# Altium PCB PCB1.PcbDoc
Units mm, origin at the board's own origin, x right, y up, seen from the top; angles counter-clockwise.
Board outline 76.45 x 67.82 mm, 2 copper layers (Top Layer, Bottom Layer); 87 components, 61 nets, 217 pads, 21 vias.
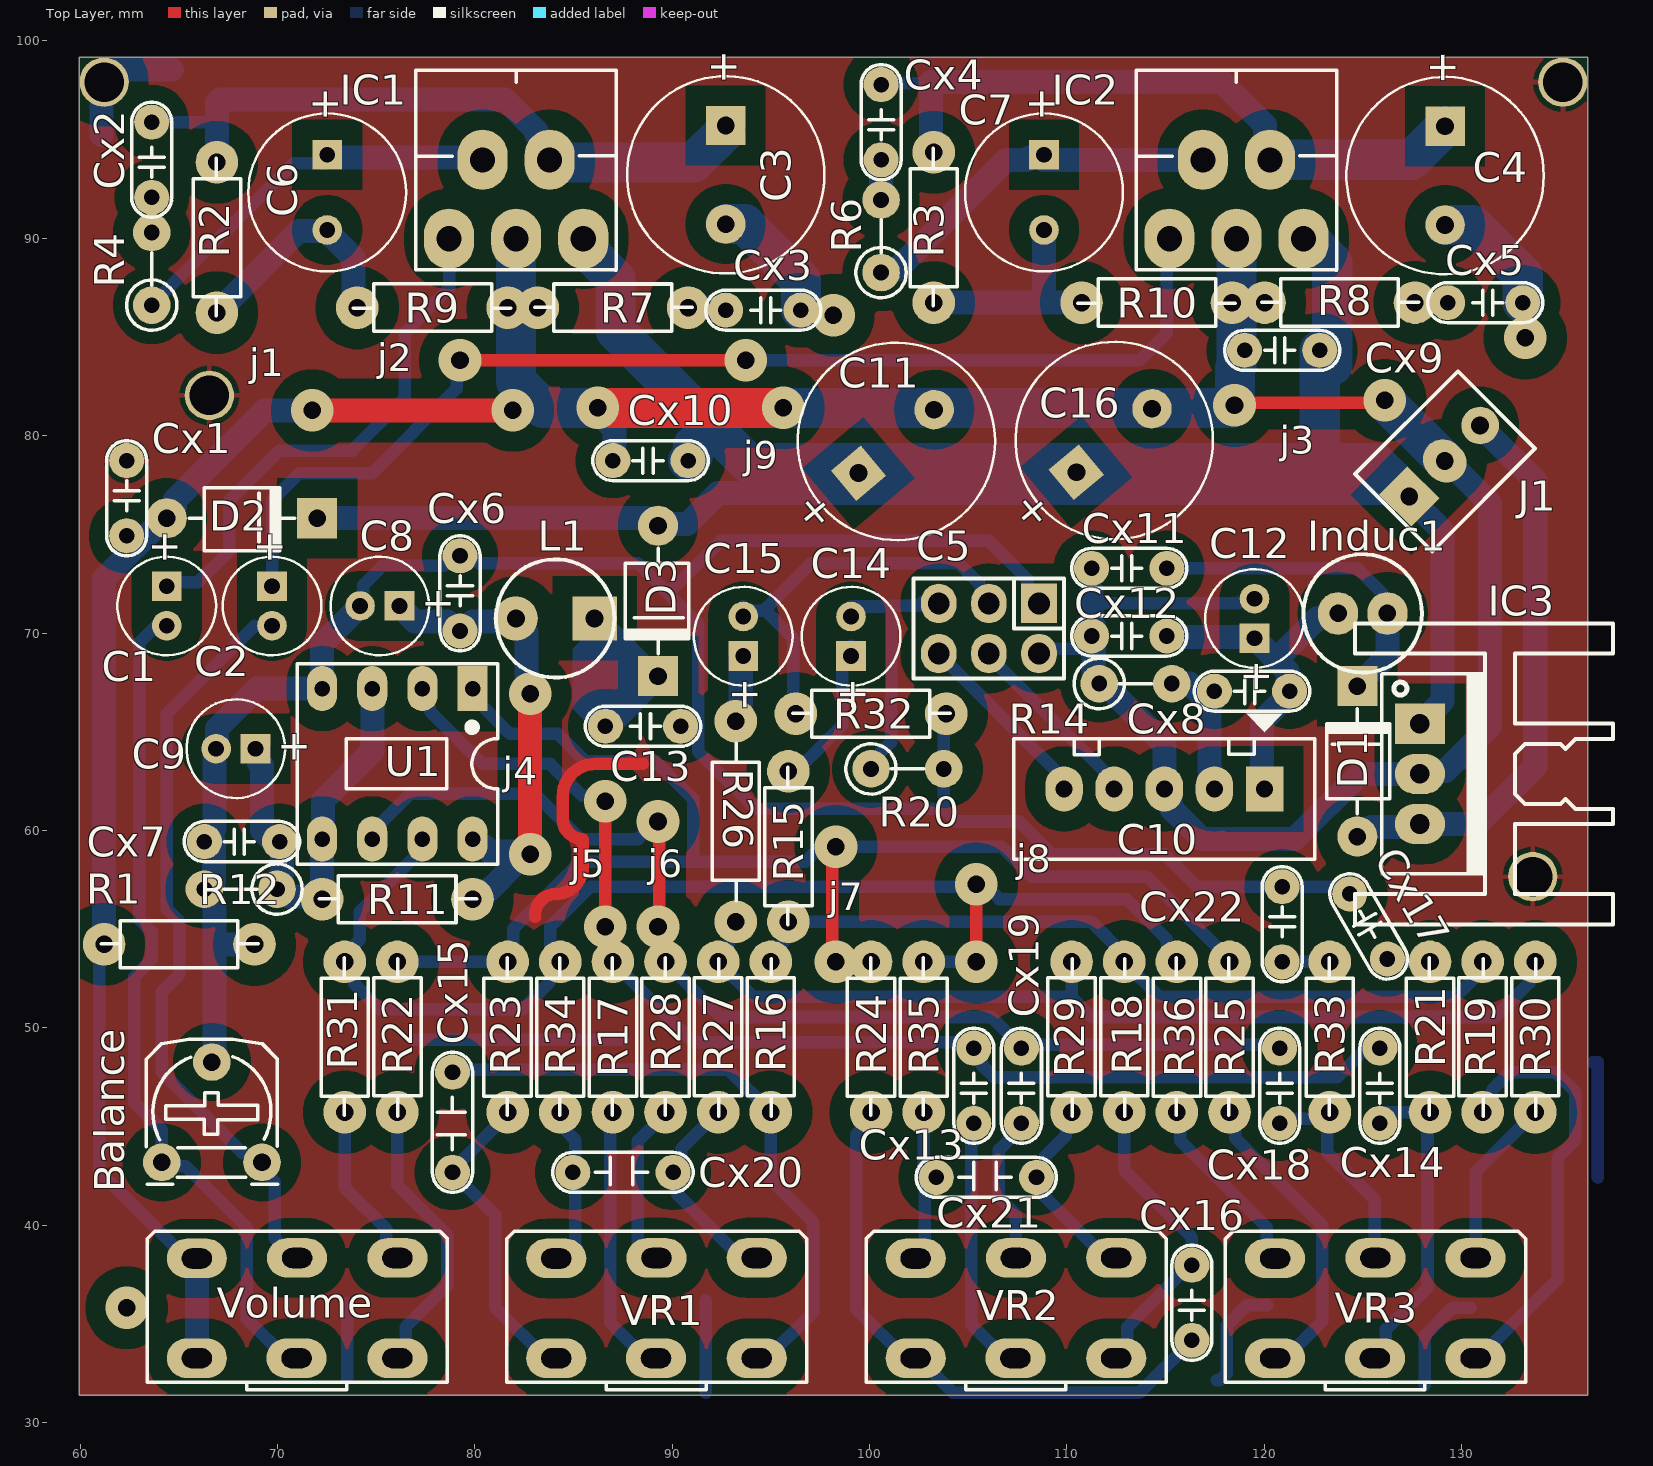
[diagram p0: Top Layer view]
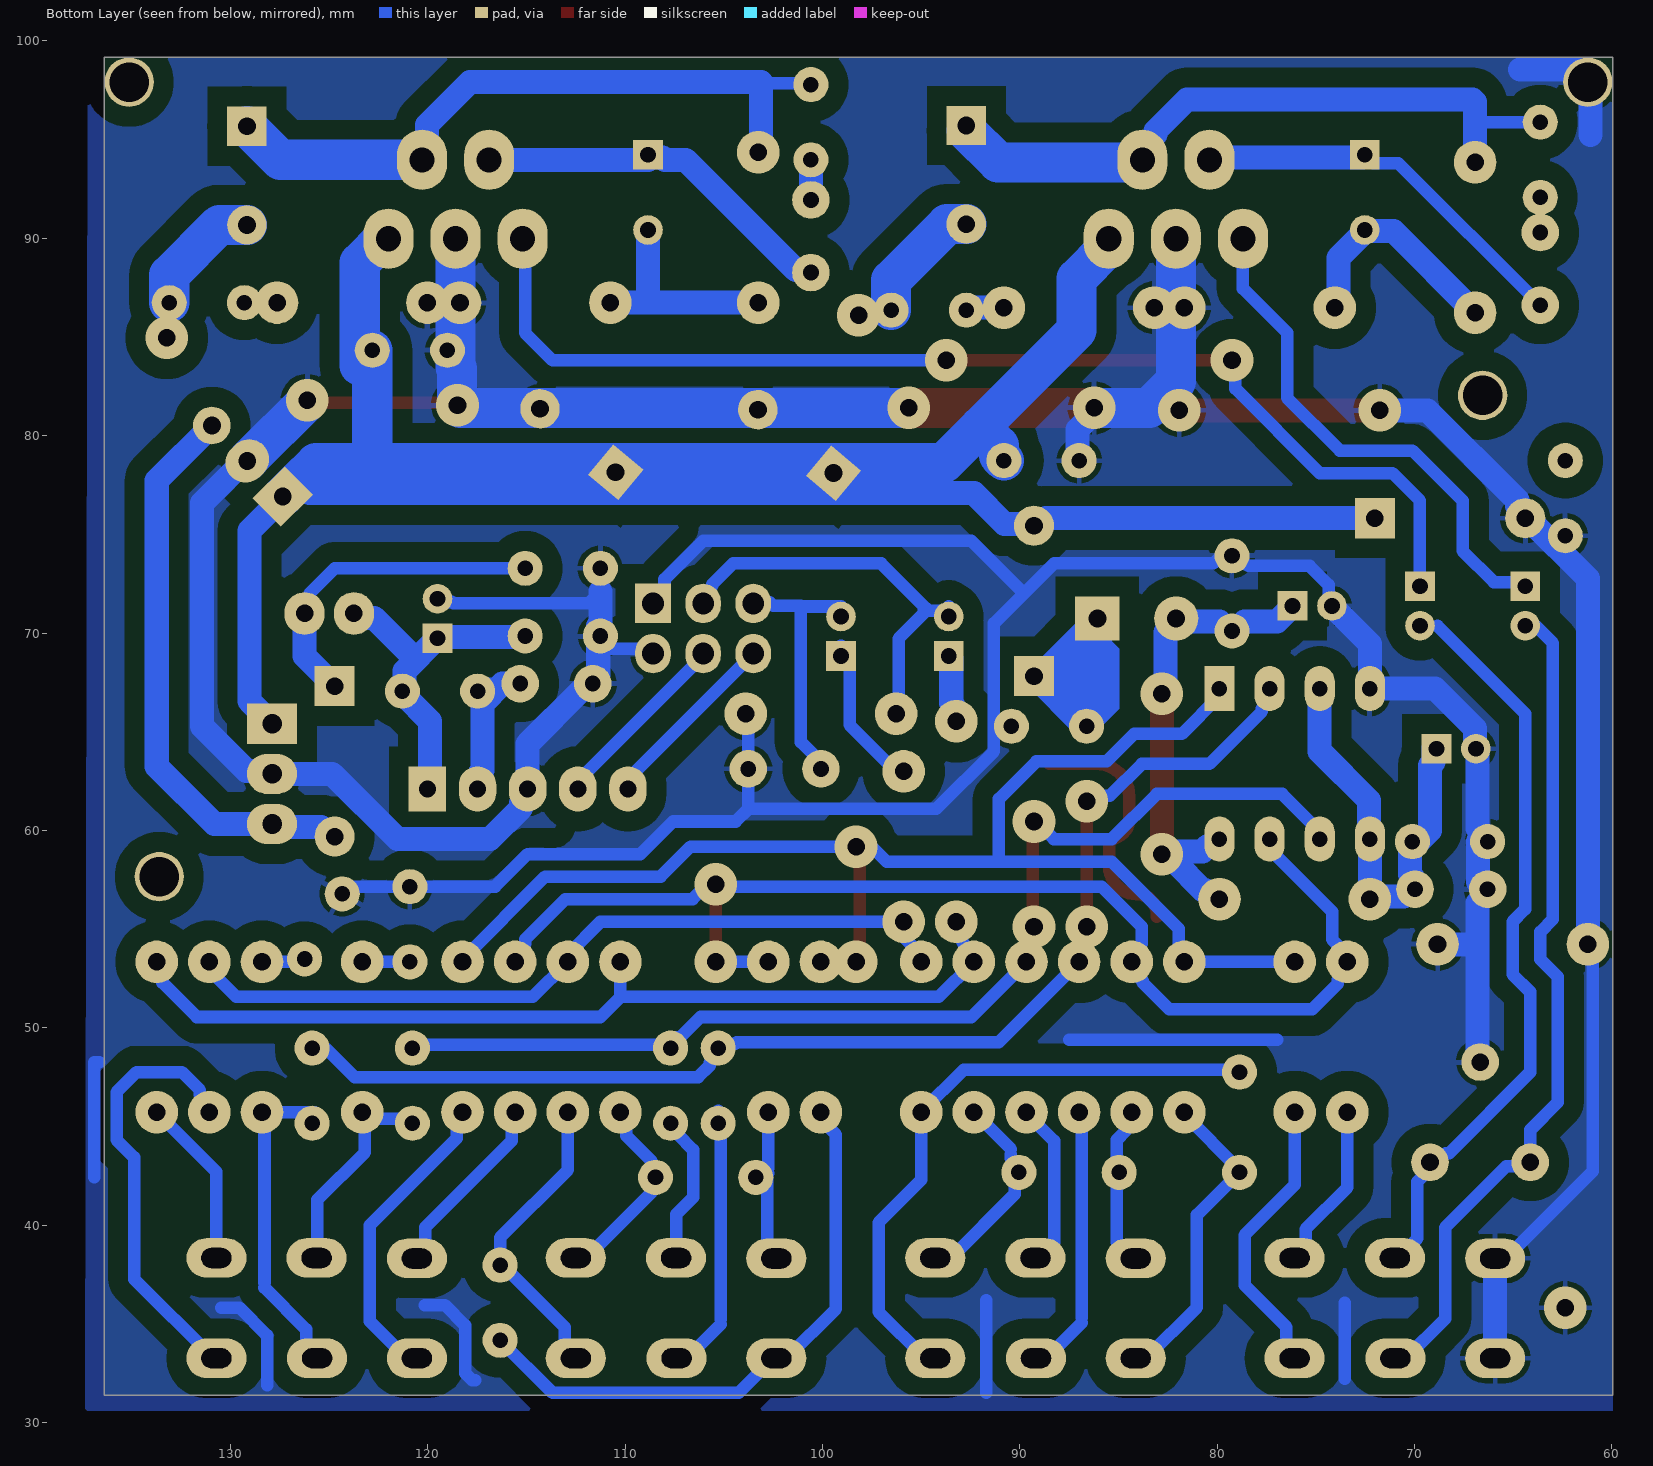
[diagram p1: Bottom Layer view, seen from below]
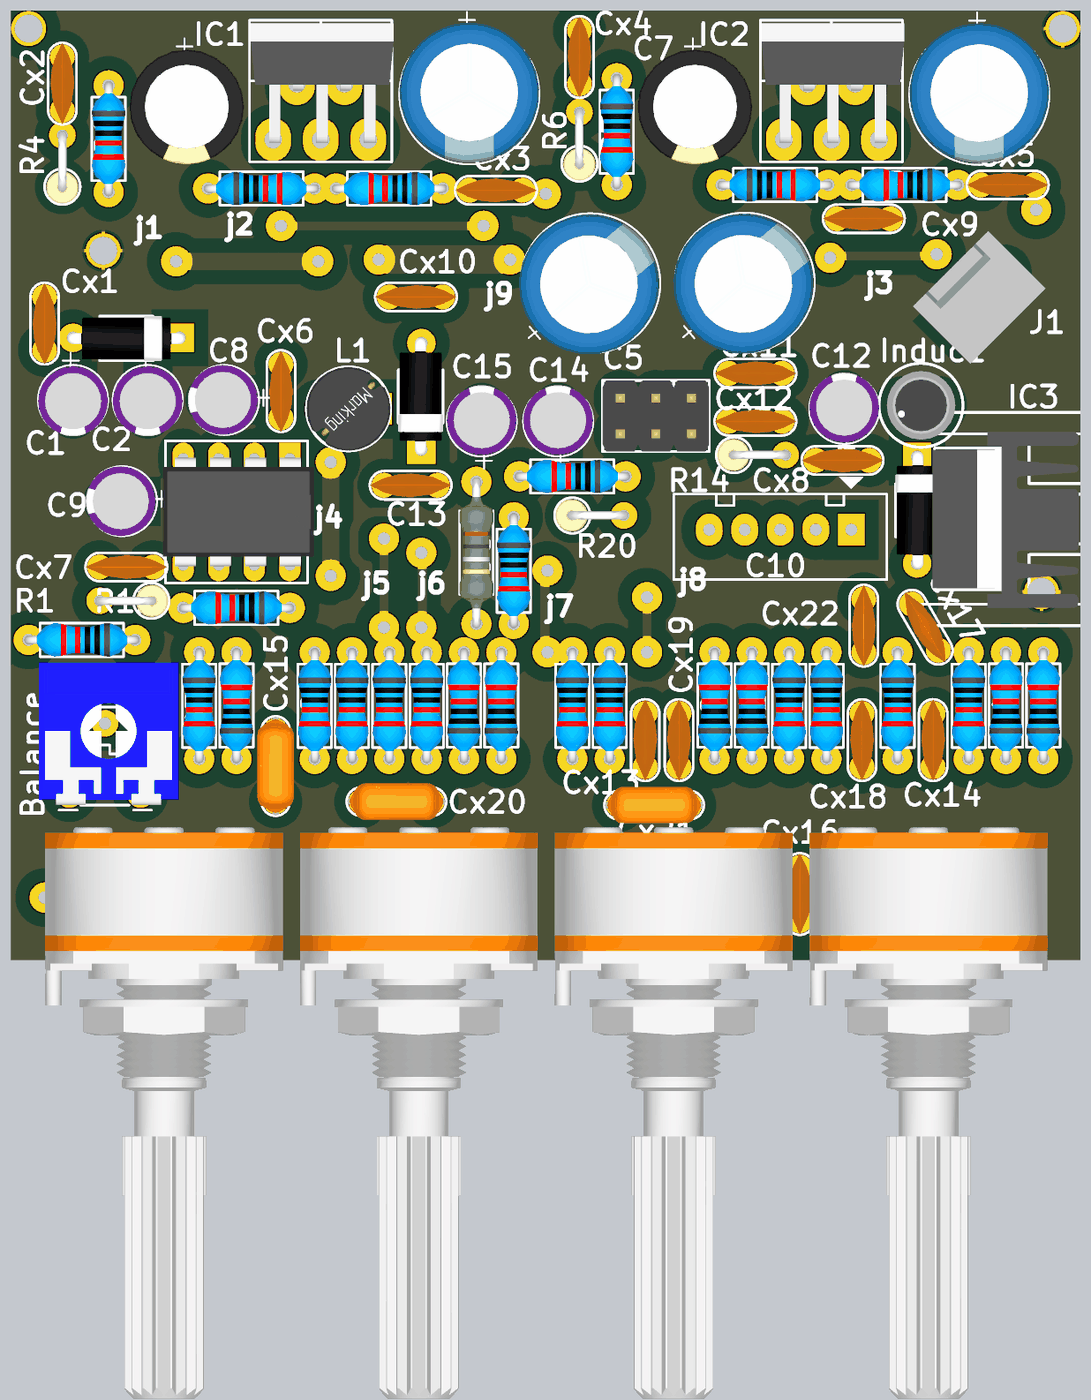
[diagram p2: 3D render of the assembled board from above, using the file's embedded part models]

## Layer stack, top to bottom
Top Solder: solder mask 0.0102, Solder Resist, Dk 3.5
Top Layer: signal copper 0.0356
Dielectric 1: dielectric 0.32, FR-4, Dk 4.8
Bottom Layer: signal copper 0.0356
Bottom Solder: solder mask 0.0102, Solder Resist, Dk 3.5

## Board outline
59.944,31.369 59.944,99.187 136.398,99.187 136.398,31.369

## Design rules (kind name [scope] priority, off if disabled: settings)
Clearance [All] p1: gap=0.254 ignorepadtopadclearanceinfootprint=FALSE except(0: Arc-Hole Track-Hole SMDPad-Hole THPad-Hole Via-Hole Fill-Hole Poly-Hole Region-Hole Text-Hole; 1.016: Arc-Fill Arc-Poly Arc-Region Track-Fill Track-Poly Track-Region SMDPad-Fill SMDPad-Poly SMDPad-Region THPad-Fill THPad-Poly THPad-Region Via-Fill Via-Poly Via-Region Fill-Fill Fill-Poly Fill-Region Poly-Poly Poly-Region Region-Region)
PolygonConnect [All] p1: connectstyle=Relief reliefconductorwidth=0.254 reliefentries=4 polygonreliefangle="90 Angle" airgapwidth=0.254
RoutingVias [All] p1: holewidth=0.711 width=1.27 viastyle="Through Hole" minholewidth=0.711 minwidth=1.27 maxholewidth=0.711 maxwidth=1.27
SolderMaskExpansion [All] p1: expansion=0.102 istentingtop=FALSE
Width [All] p1: maxlimit=2.032 minlimit=0.635 preferedwidth=1.219
30 further rules are at their usual default settings.

## Components (designator, comment, footprint, x,y, rotation, side; value= is the part's Value field where it differs from the comment)
Balance "50K" VR-S2 64.135,43.18 r0 top value="Volume 50k"
C1 "5mm" CA-ALU-5 64.389,71.374 r270 top value=104
C2 "5mm" CA-ALU-5 69.723,71.374 r270 top value=104
C3 "10BL" CA-ALU-10BL 92.71,93.218 r270 top value=104
C4 "10BL" CA-ALU-10BL 129.159,93.178 r270 top value=104
C5 "JP3x2" JP3-D2T 106.045,70.231 r180 top
C6 "8mm" CA-ALU-8 72.517,92.329 r270 top value=104
C7 "8mm" CA-ALU-8 108.839,92.329 r270 top value=104
C8 "5mm" CA-ALU-5 75.184,71.374 r180 top value=104
C9 "5mm" CA-ALU-5 67.888,64.141 r180 top value=104
C10 "Header5" Header5 120.015,62.103 r180 top
C11 "10BL" CA-ALU-10BL 101.356,79.712 r40 top value=104
C12 "5mm" CA-ALU-5 119.507,70.739 r90 top value=104
C13 "XXpF" CN1.5 88.646,65.278 r180 top value=33pF
C14 "5mm" CA-ALU-5 99.06,69.838 r90 top value=104
C15 "5mm" CA-ALU-5 93.599,69.838 r90 top value=104
C16 "10BL" CA-ALU-10BL 112.395,79.756 r40 top value=104 (schematic designator C11)
Cx1 "XXpF" CN1.5 62.357,76.962 r270 top value=33pF
Cx2 "XXpF" CN1.5 63.627,93.853 r90 top value=33pF
Cx3 "XXpF" CN1.5 94.742,86.36 r180 top value=33pF
Cx4 "XXpF" CN1.5 100.584,95.758 r90 top value=33pF
Cx5 "XXpF" CN1.5 131.318,86.741 r180 top value=33pF
Cx6 "XXpF" CN1.5 79.248,72.136 r270 top value=33pF
Cx7 "XXpF" CN1.5 68.072,59.436 r0 top value=33pF
Cx8 "XXpF" CN1.5 119.253,67.056 r0 top value=33pF
Cx9 "XXpF" CN1.5 120.777,84.328 r0 top value=33pF
Cx10 "XXpF" CN1.5 88.773,78.74 r0 top value=33pF
Cx11 "XXpF" CN1.5 113.03,73.279 r0 top value=33pF
Cx12 "XXpF" CN1.5 113.03,69.85 r0 top value=33pF
Cx13 "XXpF" CN1.5 105.283,46.939 r90 top value=33pF
Cx14 "XXpF" CN1.5 125.857,46.939 r90 top value=33pF
Cx15 "2O" CN2-O 78.74,45.212 r90 top value=33pF
Cx16 "XXpF" CN1.5 116.332,35.941 r90 top value=33pF
Cx17 "XXpF" CN1.5 125.222,55.245 r300 top value=33pF
Cx18 "XXpF" CN1.5 120.777,46.939 r90 top value=33pF
Cx19 "XXpF" CN1.5 107.696,46.939 r90 top value=33pF
Cx20 "2O" CN2-O 87.503,42.799 r0 top value=33pF
Cx21 "2O" CN2-O 105.918,42.545 r0 top value=33pF
Cx22 "XXpF" CN1.5 120.904,55.372 r270 top value=33pF
D1 "Diode" DIO-1A-SMALL 124.714,58.42 r270 top value=1N5007
D2 "Diode" DIO-1A-SMALL 63.119,75.819 r180 top value=1N5007
D3 "Diode" DIO-1A-SMALL 89.281,76.708 r90 top value=1N5007
IC1 "TDA2003" DIP5 82.091,91.98 r0 top
IC2 "TDA2003" DIP5 118.589,91.98 r0 top
IC3 "LM78xx" TO220H1 127.889,62.865 r270 top
Induc1 "L-DIP-1" L-DIP-M-5.3 124.988,70.993 r180 top value="150 mH"
J1 "Header3" HDR3 127.345,76.926 r45 top
L1 "L-DIP-1" L-DIP-M-6.0 84.074,70.739 r180 top value="150 mH"
R1 "1/4sm" RES-1/4W-SMALL 65.278,54.229 r180 top
R2 "1/4sm" RES-1/4W-SMALL 66.929,90.297 r270 top
R3 "1/4sm" RES-1/4W-SMALL 103.251,90.805 r270 top
R4 "WD" RES-1/4WD 63.627,88.265 r90 top
R6 "WD" RES-1/4WD 100.584,89.916 r90 top
R7 "1/4sm" RES-1/4W-SMALL 87.249,86.487 r180 top
R8 "1/4sm" RES-1/4W-SMALL 124.079,86.741 r180 top
R9 "1/4sm" RES-1/4W-SMALL 77.597,86.487 r0 top
R10 "1/4sm" RES-1/4W-SMALL 114.3,86.741 r0 top
R11 "1/4sm" RES-1/4W-SMALL 76.327,56.515 r180 top
R12 "WD" RES-1/4WD 68.326,57.023 r180 top
R14 "WD" RES-1/4WD 113.284,67.437 r0 top
R15 "1/4sm" RES-1/4W-SMALL 95.885,59.436 r270 top
R16 "1/4sm" RES-1/4W-SMALL 94.996,49.276 r90 top
R17 "1/4sm" RES-1/4W-SMALL 86.995,49.784 r270 top
R18 "1/4sm" RES-1/4W-SMALL 112.903,49.276 r90 top
R19 "1/4sm" RES-1/4W-SMALL 131.064,49.276 r90 top
R20 "WD" RES-1/4WD 101.727,63.119 r0 top
R21 "1/4sm" RES-1/4W-SMALL 128.397,49.784 r270 top
R22 "1/4sm" RES-1/4W-SMALL 76.073,49.276 r90 top
R23 "1/4sm" RES-1/4W-SMALL 81.661,49.784 r270 top
R24 "1/4sm" RES-1/4W-SMALL 100.076,49.784 r270 top
R25 "1/4sm" RES-1/4W-SMALL 118.237,49.784 r270 top
R26 "1/4LL" RES-1/4W 93.345,60.833 r90 top
R27 "1/4sm" RES-1/4W-SMALL 92.329,49.276 r90 top
R28 "1/4sm" RES-1/4W-SMALL 89.662,49.784 r270 top
R29 "1/4sm" RES-1/4W-SMALL 110.236,49.276 r90 top
R30 "1/4sm" RES-1/4W-SMALL 133.731,49.276 r90 top
R31 "1/4sm" RES-1/4W-SMALL 73.406,49.784 r270 top
R32 "1/4sm" RES-1/4W-SMALL 100.33,65.913 r180 top
R33 "1/4sm" RES-1/4W-SMALL 123.317,49.784 r270 top
R34 "1/4sm" RES-1/4W-SMALL 84.328,49.784 r270 top
R35 "1/4sm" RES-1/4W-SMALL 102.743,49.784 r270 top
R36 "1/4sm" RES-1/4W-SMALL 115.57,49.784 r270 top
U1 "*4558" DIP8 76.2,63.373 r180 top
Volume "50K" VR-D1 70.993,33.255 r0 top value="Volume Dual 50K"
VR1 "50K" VR-D1 89.205,33.255 r0 top value="Volume Dual 50K"
VR2 "50K" VR-D1 107.417,33.255 r0 top value="Volume Dual 50K"
VR3 "50K" VR-D1 125.628,33.255 r0 top value="Volume Dual 50K"

## Footprints (in the part's own frame and the unit in brackets; to place one, negate y for a bottom-side part, rotate by r counter-clockwise, add the part's x,y. Pads: shape width x height; smd on the part's side, far side on the other; paste and mask are expansions set on the pad)
CA-ALU-5 [mm] "Polarized capacitors, Aluminum Electrolytic Capacitors, 2-Leads, Body 5x11x2x0.5"
  rect 1.5x1.5 hole 0.8: 1(-1,0)
  round 1.5 hole 0.8: 2(1,0)
  silkscreen extent -2.5,-2.5 2.5,2.5, body extent -2.41,-2.5 2.59,2.5, height 11
CA-ALU-8 [mm] "Polarized capacitors, Aluminum Electrolytic Capacitors, 2-Leads, Body 8x16x3.5x0.5"
  rect 1.5x1.5 hole 0.8: 1(-1.905,0)
  round 1.5 hole 0.8: 2(1.905,0)
  silkscreen extent -4,-4 4,4, body extent -4.1,-4.1 4.1,4.1, height 14.4
CA-ALU-10BL [mm] "Polarized capacitors, Aluminum Electrolytic Capacitors, 2-Leads, Body 10x20x5x0.6"
  rect 2x2 hole 0.9: 1(-2.5,0)
  round 2 hole 0.9: 2(2.5,0)
  silkscreen extent -5,-5 5,5, body extent -5.13,-5 4.88,5, height 16.2
CN1.5 [mil]
  round 70 hole 31: 1(-70,0) 2(80,0)
  silkscreen extent -110,-40 120,40, body extent -110,-33 120,33, height 235
CN2-O [mil]
  round 70 hole 31: 1(-100,-5) 2(100,-5)
  silkscreen extent -140,-45 140,35, body extent -139,-56 139,46, height 360
DIO-1A-SMALL [mil] "Diode 1A, W 100mil, L 350mil"
  round 80 hole 35: 1(-50,0)
  rect 80x80 hole 35: 2(-350,0)
  silkscreen extent -305,-61 -95,65, body extent -366,-61 -34,65, height 122
DIP5 [mm]
  oval 2.54x3.048 hole 1.27: 1(-3.4,-2) 2(-1.7,2) 3(0,-2) 4(1.7,2) 5(3.4,-2)
  silkscreen extent -5.08,-3.61 5.08,6.53, body extent -4.99,-2.25 5.21,6.31, height 18.81
DIP8 [mil] "DIP, 8-Leads, Row Spacing 7.62mm, Pitch 2.54mm, Body 9.91x6.73mm"
  rect 60x90 hole 31: 1(-145,-150)
  oval 60x90 hole 31: 2(-45,-150) 3(55,-150) 4(155,-150) 5(155,150) 6(55,150) 7(-45,150) 8(-145,150)
  silkscreen extent -195,-200 205,200, body extent -213,-153 213,153, height 177
HDR3 [mil] "Connector; Header; 3 Position"
  rect 80x90 hole 35.43: 1(0,0)
  oval 80x90 hole 35.43: 2(100,0)
  round 75 hole 35.43: 3(200,0)
  silkscreen extent -45,-110 245,108, body extent -50,-115 250,113, height 461
Header5 [mil] "CON5"
  rect 75x90 hole 34: 1(0,0)
  oval 75x90 hole 34: 2(100,0) 3(200,0) 4(300,0) 5(400,0)
  silkscreen extent -100,-150 500,140
JP3-D2T [mm] "6 pins, dual pin, straight, gold plating"
  rect 1.8x2 hole 1.1: 1(-2.54,-1.27)
  oval 1.8x2 hole 1.1: 2(0,-1.27) 3(2.54,-1.27) 4(2.54,1.27) 5(0,1.27) 6(-2.54,1.27)
  silkscreen extent -3.81,-2.54 3.81,2.54, body extent -3.81,-2.54 3.81,2.54, height 8.55
L-DIP-M-5.3 [mil] "THT Inductor, 2-Leads, Body 5.3  mm"
  oval 80x85 hole 35: 1(-49.21,0) q(49.21,0)
  silkscreen extent -118,-118 118,118, body extent -96,-96 96,96, height 299
L-DIP-M-6.0 [mil] "THT Inductor, 2-Leads, Body 6,0  mm"
  rect 88x88 hole 36: 1(-78.74,0)
  round 88 hole 36: 2(78.74,0)
  silkscreen extent -118,-118 118,118, body extent -118,-118 118,118, height 256
RES-1/4W [mil]
  round 85 hole 35: 1(-215,5) 2(185,5)
  silkscreen extent -173,-42 141,52, body extent -227,-42 197,52, height 95
RES-1/4W-SMALL [mil]
  round 85 hole 35: 1(-140,0) 2(160,0)
  silkscreen extent -148,-47 166,47, body extent -152,-47 172,47, height 97
RES-1/4WD [mm]
  round 1.905 hole 0.8: 1(-1.651,0) 2(2.032,0)
  silkscreen extent -2.93,-1.28 1.02,1.27, body extent -2.85,-1.14 2.35,1.16, height 9.64
TO220H1 [mil] "TO-220 - 1-2-3"
  round 0 all layers, no hole: 0(0,230)
  rect 80x100 hole 39: 1(-100,0)
  oval 80x100 hole 39: 2(0,0) 3(100,0)
  silkscreen extent -300,-130 300,385, body extent -246,-82 250,329, height 1000
VR-D1 [mil] "Volume control Dual"
  oval 120x78.74 hole 40 slot 60 at 0 deg: 1(-200,0) 2(-1,0) 3(200,0) 4(-200,199) 5(0,200) 6(200,200)
  silkscreen extent -299,-63 300,253, body extent -339,-1309 331,299, height 835
VR-S2 [mil] "Resistor Variable"
  round 75 hole 35: 1(0,0) 2(100,200) 3(200,0)
  silkscreen extent -31,-44 231,246, body extent -87,-30 307,372, height 165

## Part data
Balance: library part VR-S, "Var Resistor"
C1 C2 C3 C4 C6 C7 C8 C9 C11 C12 C14 C15 C16: library part CN-ALU-DIP, "Capacitor (Semiconductor SIM Model)", LatestRevisionDate=17-Jul-2002, LatestRevisionNote="Re-released for DXP Platform.", PackageReference=C1206, Publisher="Altium Limited"
C5: "WR-PHD 2.54 mm Dual Socket Header", Manufacturer="W¨¹rth Elektronik eiSos GmbH", partNo=61300621821, ComponentLink1 Description=Manufacturer, ComponentLink1URL=http://www.we-online.com, ComponentLink2 Description=Datasheet, ComponentLink2URL=http://katalog.we-online.de/em/datasheet/6130xx21821.pdf, Created by="Karrer Zheng", Created Date="29 March 2013", NoPins=06
C10: "Header IDC, 5 x 1 Pin Vertical 2.54mm Pitch (Non-Boxed, Male)", Manufacturer="W¨¹rth Elektronik eiSos GmbH", partNo=613002143121, ComponentLink1 Description=Manufacturer, ComponentLink1URL=http://www.we-online.com, ComponentLink2 Description=Datasheet, ComponentLink2URL=http://katalog.we-online.de/em/datasheet/6130xx143121.pdf, Created by="Karrer Zheng", Created Date="29 March 2013", NoPins=02
C13 Cx1 Cx2 Cx3 Cx4 Cx5 Cx6 Cx7 Cx8 Cx9 Cx10 Cx11 Cx12 Cx13 Cx14 Cx15 Cx16 Cx17 Cx18 Cx19 Cx20 Cx21 Cx22: library part CN
D1 D2 D3: "Default Diode", Code - JEDEC=DO-214-AB, Published=8-Jun-2000, Publisher="Altium Limited", Revision="July-2002: Re-released for DXP Platform."
IC1 IC2: "10W CAR RADIO AUDIO AMPLIFIER"
IC3: "Positive Voltage Regulator", ComponentLink1Description="Manufacturer Link", ComponentLink1URL=http://www.st.com/, ComponentLink2Description=Datasheet, ComponentLink2URL=http://www.st.com/stonline/products/literature/ds/2146/l78m05c.pdf, DatasheetVersion=Apr-1994, LatestRevisionDate=17-Jul-2002, LatestRevisionNote="Re-released for DXP Platform.", Note="Tab is connected to pin 3 (GND).", PackageDescription="TO, Thru-Hole, Vertical, Heatsink Mounted; 3 In-Line Leads; Pitch 2.54 mm; Pin sequence 1, 3, 2", PackageReference=ISOWATT220AB, PackageVersion=Jul-1998, Published=24-Aug-2001, Publisher="Altium Limited"
Induc1 L1: "Inductor"
J1: "Header IDC, 3 x 1 Pin Vertical 2.54mm Pitch (Non-Boxed, Male)", Manufacturer="W¨¹rth Elektronik eiSos GmbH", partNo=613002143121, ComponentLink1 Description=Manufacturer, ComponentLink1URL=http://www.we-online.com, ComponentLink2 Description=Datasheet, ComponentLink2URL=http://katalog.we-online.de/em/datasheet/6130xx143121.pdf, Created by="Karrer Zheng", Created Date="29 March 2013", NoPins=02
R1 R2 R3 R4 R6 R7 R8 R9 R10 R11 R12 R14 R15 R16 R17 R18 R19 R20 R21 R22 R23 R24 R25 R26 R27 R28 R29 R30 R31 R32 R33 R34 R35 R36: library part Res, "Res", Manufacturer="Generic Components", Class=Passive, Published=08/06/2000, Publisher="Altium Hobart Technology Centre", SubClass=R
U1: library part 4558
Volume: library part VR-DN, "Volume control Dual"
VR1 VR2 VR3: library part VR-DPN, "Volume control Dual"

## Free pads (board coordinates)
  round 2.5 hole 2: 2(61.214,97.917) 2(66.548,82.042) 2(133.604,57.658) 2(135.128,97.917)

## Via types
v1: diameter 2.159, hole 0.889, Top Layer to Bottom Layer, 21 vias

## Nets (pads, with @x,y where several pads share a name; then routed paths per layer and width w, separated by ;. In a path a pad name is that pad's centre, name@x,y a point inside that pad or via, vN(x,y) a via of type N, cw(c..) or ccw(c..) an arc to the next point about the centre after c; other vN are vias at no path point)
+1/2Vcc: C9.1 Cx7.2 R11.2 R12.1 U1.3 U1.5 | length 21.8
  Bottom Layer w1.219: C9.1@69.028,64.169 69.028,63.474 69.215,63.287 69.215,60.001 Cx7.2@69.723,59.493 ; Cx7.2 70.104,59.285 70.231,59.158 70.231,57.762 70.108,57.639 70.108,57.154 R12.1 70.163,57.023 70.544,56.642 72.136,56.642 R11.2 U1.5 72.304,59.604 72.304,61.509 74.803,64.008 U1.3
+5: D1.1 IC3.3 J1.3 | length 28.9
  Bottom Layer w1.219: D1.1 124.934,59.69 125.413,60.169 127.733,60.169 IC3.3 130.81,60.325 133.731,63.246 133.731,77.724 J1.3
+12: C11.1 C16.1 Cx9.2 Cx10.2 D2.2 D3.1 IC1.5 IC2.5 IC3.1 J1.1 | length 131.6
  Bottom Layer w1.219: D2.2 88.68,75.819 89.061,75.438 D3.1 89.375,75.532 90.772,75.532 92.329,77.089 99.441,77.089 109.855,77.089 110.48,77.089 J1.1@125.984,77.089 ; J1.1 127.345,76.871 129.032,75.184 129.032,66.548 128.549,66.065 128.549,65.811 128.143,65.405 IC3.1
  Bottom Layer w2.032: IC1.5 85.491,89.589 87.122,87.958 87.122,85.344 92.011,80.454 ; Cx10.2 91.059,78.994 91.059,79.502 92.011,80.454 ; IC2.5@122.174,90.043 123.444,88.773 123.444,83.566 ; Cx9.2 122.809,78.613 ; J1.1 126.583,77.688 125.658,78.613 122.809,78.613 ; 92.011,80.454 93.853,78.613 99.441,78.613 109.855,78.613 110.48,78.613 122.809,78.613
+PRE: C8.1 Cx6.2 L1.2 R11.1 U1.8 | length 24.7
  Top Layer w1.219: v1(82.804,58.801) v1(82.804,66.929)
  Bottom Layer w1.219: C8.1 76.967,70.591 78.61,70.591 78.99,70.211 79.097,70.211 79.248,70.362 79.399,70.211 79.506,70.211 79.886,70.591 82.074,70.591 82.624,70.041 82.624,67.109 v1(82.804,66.929) ; U1.8 79.883,59.361 80.024,59.22 80.457,59.22 80.75,58.928 82.677,58.928 v1(82.804,58.801) ; R11.1@80.211,56.695 80.317,56.695 80.607,56.985 80.734,56.985 v1@82.116,58.367
Audio_L: Balance.1 C1.2 Volume.2 | length 42.4
  Bottom Layer w0.635: C1.2@63.881,70.374 62.992,69.485 62.992,55.499 63.627,54.864 63.627,53.467 62.738,52.578 62.738,46.228 64.135,44.831 Balance.1 64.339,42.976 65.355,42.976 68.453,39.878 68.453,35.246 70.444,33.255 Volume.2
Audio_R: Balance.3 C2.2 Volume.5 | length 37.7
  Bottom Layer w0.635: 68.834,70.358 64.389,65.913 64.389,56.007 65.024,55.372 65.024,52.705 64.135,51.816 64.135,47.752 68.249,43.638 68.413,43.638 68.871,43.18 Balance.3 69.215,42.836 69.85,42.201 69.85,39.324 70.838,38.335 Volume.5
BL_L: C5.4 C10.5 | length 9.4
  Bottom Layer w0.635: C5.4 109.728,62.738 C10.5@109.728,62.103
BL_R: C5.5 C10.4 | length 9.1
  Bottom Layer w0.635: C5.5 106.045,68.834 112.152,62.727 C10.4@112.152,62.368
DGND: C10.2 Cx8.1 R14.2 | length 7.8
  Bottom Layer w0.635: R14.2@116.205,67.437 Cx8.1@117.475,67.437
  Bottom Layer w1.219: R14.2 116.205,67.437 117.221,66.421 117.221,63.032 117.344,62.91 C10.2@117.344,62.289
GND: C5.6 C10.3 C11.2 C12.2 C16.2 Cx1.2 Cx9.1 Cx10.1 Cx11.1 Cx12.1 D2.1 IC1.3 IC2.3 IC3.2 J1.2 pad.2@61.214,97.917 R1.2 R7.2 R8.2 R9.2 R10.2 R14.1 Volume.1 Volume.4 | length 230
  Top Layer w0.635: v1(118.491,81.534) 118.618,81.661 125.984,81.661 v1(126.111,81.788)
  Top Layer w1.219: v1(71.755,81.28) v1(81.915,81.28)
  Top Layer w2.032: v1(86.233,81.407) v1(95.631,81.407)
  Bottom Layer w0.635: R1.2@60.96,54.229 60.96,42.739 65.389,38.31 Volume.4 ; 73.533,32.226 73.533,36.068 ; 91.694,31.496 91.694,36.195 ; C5.6@108.204,68.961 C5.6 ; C5.6@108.458,69.215 Cx12.1@110.998,69.215 ; 111.252,72.112 111.863,71.501 118.703,71.501 118.775,71.573 119.341,71.573 C12.2 ; 117.602,32.131 117.738,32.131 118.11,32.503 118.11,34.925 119.126,35.941 120.153,35.941 ; 128.143,31.877 128.143,34.417 129.54,35.814 130.449,35.814 ; 136.652,48.26 136.906,48.26 136.906,42.418
  Bottom Layer w1.219: 61.087,95.25 61.087,97.79 cw(c61.214,97.79) 61.214,97.917 cw(c61.849,97.917) 61.849,98.552 64.643,98.552 ; R1.2 61.214,72.771 64.262,75.819 D2.1 ; D2.1@64.423,76.073 64.795,76.445 64.795,76.733 69.342,81.28 v1(71.755,81.28) ; Volume.1 Volume.4 ; v1(81.915,81.28) 81.978,81.343 83.439,81.343 ; v1(86.233,81.407) 86.233,81.153 87.073,80.313 87.073,78.818 Cx10.1 ; Cx12.1 111.252,70.108 111.252,72.112 ; Cx12.1@111.359,70.352 111.359,67.897 111.633,67.623 R14.1 ; R14.1@111.95,67.306 112.161,67.094 112.23,67.094 114.935,64.389 C10.3 114.935,61.727 115.278,61.384 115.278,61.125 116.84,59.563 121.539,59.563 124.841,62.865 IC3.2 128.363,62.865 128.518,63.021 129.188,63.021 131.445,65.278 131.445,76.581 126.238,81.788 v1(126.111,81.788)
  Bottom Layer w2.032: IC1.3 82.091,82.755 83.439,81.407 v1(86.233,81.407) ; v1(95.631,81.407) 118.33,81.407 118.457,81.534 v1(118.491,81.534) 118.515,81.558 118.515,83.413 118.589,83.486 IC2.3 ; v1(126.111,81.788) 126.111,81.754 129.009,78.856 129.009,78.854 J1.2
  other v1: 62.357,35.814
Ground: Cx1.1 pad.2@66.548,82.042 pad.2@133.604,57.658 pad.2@135.128,97.917 | length 13.1
  Top Layer w0.635: 83.058,55.626 83.058,55.753 cw(c84.074,55.753) 84.074,56.769 ccw(c84.074,58.166) 85.471,58.166 85.471,59.563 cw(c85.471,60.579) 84.455,60.579 84.455,61.722 cw(c86.106,61.722) 86.106,63.373 88.519,63.373
IN_LEFT: C5.3 C14.2 R20.1 | length 12.9
  Bottom Layer w0.635: C14.2@99.06,71.346 101.092,71.346 101.092,64.479 100.076,63.463 R20.1 ; 101.092,71.374 102.482,71.374 102.678,71.57 102.939,71.57 C5.3@103.124,71.755
IN_RIGHT: C5.2 C15.2 R32.2 | length 19.9
  Bottom Layer w0.635: C15.2 93.881,71.12 94.869,71.12 ; C15.2@93.599,71.346 C15.2@93.646,71.299 ; 94.742,71.12 96.139,69.723 R32.2@96.139,66.294 ; 94.742,71.247 97.028,73.533 104.521,73.533 105.574,72.48 105.574,72.387 105.822,72.139 105.822,71.913 C5.2@105.678,71.769
NetC1_1: C1.1 IC1.1 | length 26.5
  Bottom Layer w0.635: C1.1 64.593,72.578 65.974,72.578 67.564,74.168 67.564,76.708 70.104,79.248 73.787,79.248 76.454,81.915 76.454,85.217 78.691,87.454 IC1.1
NetC2_1: C2.1 IC2.1 | length 58.8
  Top Layer w0.635: v1(79.248,83.82) v1(93.726,83.82)
  Bottom Layer w0.635: C2.1 69.723,76.708 71.12,78.105 74.803,78.105 79.081,82.383 79.081,83.653 v1(79.248,83.82) ; v1(93.726,83.82) 113.674,83.82 115.062,85.208 115.062,89.853 IC2.1
NetC3_1: C3.1 Cx2.2 IC1.4 R2.1 | length 34.7
  Bottom Layer w0.635: Cx2.2 66.802,95.885 66.929,95.758
  Bottom Layer w1.219: R2.1 66.929,95.758 66.929,96.901 67.056,97.028 81.534,97.028 83.131,95.431 83.131,95.252 83.791,94.591 IC1.4
  Bottom Layer w2.032: IC1.4 83.918,93.853 91.099,93.853 C3.1@92.71,95.464
NetC4_1: C4.1 Cx4.2 IC2.4 R3.1 | length 35.5
  Bottom Layer w0.635: Cx4.2 100.647,97.853 103.06,97.853 103.124,97.917
  Bottom Layer w1.219: R3.1 103.124,94.488 103.124,97.917 117.856,97.917 120.036,95.737 120.036,94.233 IC2.4
  Bottom Layer w2.032: IC2.4 127.461,93.98 C4.1
NetC6_1: C6.1 IC1.2 R4.1 | length 20
  Bottom Layer w0.635: R4.1 70.814,93.801 72.084,93.801 C6.1
  Bottom Layer w1.219: C6.1 72.644,94.107 80.264,94.107 IC1.2
NetC6_2: C6.2 R2.2 R9.1 | length 11.9
  Bottom Layer w1.219: R2.2 71.066,90.37 72.463,90.37 C6.2 72.517,90.348 73.861,89.004 73.861,86.667 R9.1
NetC7_1: C7.1 IC2.2 R6.1 | length 18.7
  Bottom Layer w1.219: R6.1 100.715,88.396 101.35,88.396 106.934,93.98 107.984,93.98 108.098,94.094 C7.1@108.839,94.094 ; C7.1@108.839,93.98 IC2.2
NetC7_2: C7.2 R3.2 R10.1 | length 11.2
  Bottom Layer w1.219: R3.2 108.966,86.741 ; C7.2 108.839,86.868 108.966,86.741 ; R10.1 108.966,86.741
NetC10_1: C10.1 C12.1 Cx8.2 Cx12.2 | length 17.6
  Bottom Layer w1.219: Cx12.2 115.117,69.795 119.451,69.795 120.158,69.088 120.531,68.715 121.178,68.068 121.178,67.163 Cx8.2 121.285,66.929 119.888,65.532 119.888,62.23 C10.1 ; 120.594,68.651 122.717,70.774 123.519,70.774 123.738,70.993
NetC13_2: C13.2 D3.2 L1.1 | length 7.6
  Bottom Layer w1.219: L1.1 88.589,68.224 D3.2@88.875,68.224 ; C13.2 86.741,65.278 D3.2
NetC14_1: C14.1 R15.1 | length 7.9
  Bottom Layer w0.635: R15.1 96.266,62.992 98.627,65.353 98.627,68.914 C14.1@99.06,69.346
NetC15_1: C15.1 R26.2 | length 3.5
  Bottom Layer w1.219: R26.2 93.398,65.712 93.398,66.376 93.472,66.451 93.472,68.711 C15.1
NetCx2_1: Cx2.1 R4.2
NetCx3_2: Cx3.2 R7.1 | length 2
  Bottom Layer w1.219: R7.1 92.71,86.487 Cx3.2
NetCx4_1: Cx4.1 R6.2 | length 2
  Bottom Layer w1.219: R6.2 Cx4.1
NetCx5_2: Cx5.2 R8.1
NetCx11_2: Cx11.2 D1.2 Induc1.1 | length 16.9
  Bottom Layer w0.635: Cx11.2 124.714,73.279 125.971,72.022 125.971,71.26 Induc1.1
  Bottom Layer w1.219: D1.2 125.12,67.716 126.238,68.834 Induc1.1
NetCx13_1: Cx13.1 VR2.2 | length 13.6
  Bottom Layer w0.635: 105.156,34.967 106.867,33.255 VR2.2 ; 105.156,35.221 105.156,45.669 Cx13.1@105.283,45.796
NetCx13_2: Cx13.2 Cx14.2 R17.1 U1.2 | length 60.8
  Top Layer w0.635: v1(86.614,55.118) v1(86.614,61.468)
  Bottom Layer w0.635: U1.2 77.343,66.561 77.73,66.175 77.73,66.034 80.391,63.373 83.82,63.373 85.433,61.76 86.322,61.76 v1(86.614,61.468) ; R17.1 91.059,49.276 104.34,49.276 104.426,49.19 105.064,49.19 Cx13.2 105.283,48.662 105.722,48.223 105.722,48.075 106.299,47.498 123.698,47.498 125.13,48.93 125.329,48.93 Cx14.2@125.857,49.458
NetCx14_1: Cx14.1 R21.2 VR3.2 | length 15.9
  Bottom Layer w0.635: VR3.2 126.157,33.809 126.157,34.717 128.27,36.83 ; Cx14.1@125.73,45.72 128.27,45.72 128.27,37.084
NetCx15_1: Cx15.1 R23.2 VR1.1 | length 16.1
  Bottom Layer w0.635: R23.2 81.661,45.593 78.867,42.799 Cx15.1 81.026,40.513 81.026,35.83 83.601,33.255 VR1.1
NetCx15_2: Cx15.2 R16.1 VR1.3 | length 31.9
  Bottom Layer w0.635: Cx15.2@78.867,47.879 92.837,47.879 R16.1 94.996,42.291 97.155,40.132 97.155,35.602 94.809,33.255 VR1.3
NetCx16_1: Cx16.1 R24.2 VR2.1 | length 30.2
  Bottom Layer w0.635: R24.2 100.076,45.348 99.314,44.586 99.314,35.754 101.813,33.255 102.491,33.255 104.251,31.496 113.665,31.496 Cx16.1
NetCx16_2: Cx16.2 R18.1 VR2.3 | length 15.5
  Bottom Layer w0.635: VR2.3 113.063,33.822 113.063,34.831 116.205,37.973 Cx16.2 116.332,39.37 112.903,42.799 R18.1
NetCx17_2: Cx17.2 R21.1 | length 2.4
  Bottom Layer w0.635: Cx17.2@125.984,53.34 R21.1
NetCx18_1: Cx18.1 R33.2 VR3.5 | length 11.2
  Bottom Layer w0.635: Cx18.1 120.996,45.38 122.565,45.38 122.905,45.72 R33.2@123.19,45.72 ; R33.2 R33.2@123.19,45.72 ; VR3.5 125.603,38.361 125.603,41.275 123.19,43.688 R33.2@123.19,45.72
NetCx18_2: Cx18.2 Cx19.2 R28.1 U1.6 | length 55.1
  Top Layer w0.635: v1(89.281,55.118) 89.344,55.181 89.344,60.389 v1@89.408,60.452
  Bottom Layer w0.635: U1.6 74.803,59.944 76.708,61.849 83.058,61.849 85.344,59.563 88.274,59.563 v1@89.163,60.452 ; R28.1 92.456,50.546 106.172,50.546 107.196,49.522 Cx19.2@107.688,49.522 ; Cx19.2 107.874,49.149 120.599,49.149 Cx18.2
  other v1: 89.281,60.452
NetCx19_1: Cx19.1 VR2.5 | length 8
  Bottom Layer w0.635: Cx19.1@107.384,45.612 107.35,45.577 107.35,44.612 106.553,43.815 106.553,41.402 107.417,40.538 VR2.5
NetCx20_1: Cx20.1 R34.2 VR1.4 | length 8
  Bottom Layer w0.635: VR1.4 84.279,38.31 85.09,39.121 85.09,42.669 Cx20.1@85.087,42.672 ; R34.2 84.62,45.428 84.62,44.793 85.087,44.326 Cx20.1@85.087,42.926
NetCx20_2: Cx20.2 R27.1 VR1.6 | length 10.1
  Bottom Layer w0.635: 90.456,43.593 90.456,43.394 90.262,43.2 90.262,41.564 93.491,38.335 VR1.6 ; 90.456,43.847 R27.1
NetCx21_1: Cx21.1 R35.2 VR2.4 | length 7.4
  Bottom Layer w0.635: VR2.4 102.803,38.776 102.803,42.577 Cx21.1@102.743,42.637 ; Cx21.1@102.743,42.891 R35.2
NetCx21_2: Cx21.2 R29.1 VR2.6 | length 9.9
  Bottom Layer w0.635: R29.1@110.109,45.72 109.944,45.555 109.944,44.539 108.677,43.272 108.677,42.637 108.585,42.545 108.677,42.453 108.677,41.631 111.973,38.335 VR2.6
NetCx22_2: Cx22.2 R33.1 | length 2.4
  Bottom Layer w0.635: Cx22.2 R33.1
NetR15_2: R15.2 R16.2 R18.2 R19.2 | length 40.5
  Bottom Layer w0.635: R16.2 94.996,53.721 95.885,54.61 R15.2@96.52,55.245 ; R15.2 111.252,55.372 112.903,53.721 R18.2 114.681,51.562 129.698,51.562 131.064,52.928 R19.2
NetR17_2: R17.2 VR1.2 | length 13.5
  Bottom Layer w0.635: 86.868,35.043 88.655,33.255 VR1.2 ; 86.868,35.297 86.868,45.593 R17.2
NetR19_1: R19.1 VR3.3 | length 22
  Bottom Layer w0.635: VR3.3 130.863,33.255 134.874,37.266 134.874,43.434 135.763,44.323 135.763,46.736 134.747,47.752 132.461,47.752 131.548,46.839 131.548,46.617 131.064,46.132 R19.1
NetR22_1: R22.1 Volume.3 | length 14.6
  Bottom Layer w0.635: Volume.3 76.492,33.674 76.492,34.836 78.613,36.957 78.613,39.497 76.073,42.037 R22.1
NetR22_2: R22.2 R23.1 R24.1 R25.1 U1.1 | length 72.2
  Top Layer w0.635: v1@97.917,59.182 98.108,58.991 98.108,53.53 v1(98.298,53.34)
  Bottom Layer w0.635: R22.2 R23.1 81.953,53.632 81.953,55.029 85.344,58.42 96.743,58.42 97.505,59.182 v1(98.298,59.182) 106.68,59.182 108.204,57.658 114.046,57.658 118.237,53.467 R25.1 ; U1.1 79.883,66.802 81.788,64.897 84.201,64.897 85.598,63.5 89.154,63.5 91.059,61.595 91.059,58.812 ; v1(98.298,53.34) R24.1
NetR25_2: R25.2 VR3.1 | length 15.7
  Bottom Layer w0.635: R25.2 118.529,45.428 118.529,44.412 122.936,40.005 122.936,35.119 121.072,33.255 VR3.1
NetR26_1: R26.1 R27.2 R29.2 R30.2 | length 48.3
  Bottom Layer w0.635: R26.1 92.926,55.08 92.926,54.35 92.329,53.752 R27.2 94.107,51.562 110.236,51.562 ; R29.2 110.236,51.562 ; R30.2 133.439,53.048 133.439,52.286 131.699,50.546 111.252,50.546 110.236,51.562
NetR28_2: R28.2 VR1.5 | length 8.4
  Bottom Layer w0.635: VR1.5 89.05,38.335 88.265,39.121 88.265,44.269 89.662,45.666 R28.2
NetR30_1: R30.1 VR3.6 | length 8.6
  Bottom Layer w0.635: VR3.6 130.708,42.697 R30.1
NetR31_1: R31.1 R34.1 R35.1 R36.1 U1.7 | length 64.2
  Top Layer w0.635: v1(105.41,53.34) v1(105.41,57.277)
  Bottom Layer w0.635: U1.7 77.343,59.055 74.168,55.88 74.168,54.474 73.406,53.712 73.406,52.928 73.89,52.443 73.89,52.221 75.184,50.927 82.423,50.927 83.78,52.284 83.78,52.38 R34.1@84.328,52.928 ; R34.1 84.328,53.752 83.82,54.26 83.82,55.118 85.852,57.15 v1@105.41,57.15 ; R35.1 v1(105.41,53.34) ; v1(105.41,57.277) 105.822,57.277 106.584,56.515 113.03,56.515 115.062,54.483 115.062,54.26 115.57,53.752 R36.1
NetR31_2: R31.2 Volume.6 | length 8.5
  Bottom Layer w0.635: R31.2 73.406,41.91 75.519,39.797 75.519,38.889 Volume.6
NetR36_2: R36.2 VR3.4 | length 9.5
  Bottom Layer w0.635: R36.2 115.737,45.553 115.737,44.283 120.129,39.891 120.129,38.729 VR3.4
OUT_LEFT: C3.2 Cx3.1 | length 6.5
  Bottom Layer w2.032: C3.2 93.686,90.718 96.52,87.884 Cx3.1
  other v1: 98.171,86.106
OUT_RIGHT: C4.2 Cx5.1 | length 6.4
  Bottom Layer w2.032: C4.2 130.556,90.678 133.096,88.138 Cx5.1
  other v1: 133.223,84.963
PreGND: Balance.2 C5.1 C8.2 C9.2 C13.1 Cx6.1 Cx7.1 Cx17.1 Cx22.1 R1.1 R12.2 R20.2 R32.1 U1.4 | length 130.5
  Bottom Layer w0.635: 66.802,54.356 66.929,54.229 ; C8.2 74.35,71.54 74.35,72.445 75.311,73.406 78.431,73.406 78.939,73.914 Cx6.1 ; 76.962,49.403 87.503,49.403 ; Cx6.1@79.248,74.168 79.556,74.168 80.191,73.533 88.265,73.533 89.789,72.009 ; R32.1@103.759,66.294 R20.2 103.759,61.087 ; C5.1 108.002,72.084 108.002,72.719 106.045,74.676 92.456,74.676 89.789,72.009 ; Cx17.1@124.46,57.15 Cx22.1 116.586,57.15 114.935,58.801 109.22,58.801 107.569,60.452 104.394,60.452 103.759,61.087 ; 89.789,72.009 91.313,70.485 91.313,64.008 94.234,61.087 103.759,61.087
  Bottom Layer w1.219: R12.2 66.294,56.837 66.802,56.329 66.802,54.356 66.802,48.387 Balance.2 ; Cx7.1 66.294,59.587 66.802,60.095 66.802,63.857 66.834,63.889 66.834,64.087 C9.2 66.941,64.195 66.941,65.163 68.961,67.183 U1.4 72.263,69.453 C8.2 ; R12.2@66.675,57.277 66.78,57.382 Cx7.1@66.78,59.436 ; 66.929,54.229 R1.1
pads on no net: IC3.0 Induc1.q

## Polygon pours and split planes (outlines as drawn)
GND on Bottom Layer "NONET_L-01_P-001" (solid, remove dead copper, pour order 0): 59.944,99.187 59.944,30.607 137.351,30.607 137.223,99.187
PreGND on Bottom Layer "NONET_L-01_P-001" (solid, remove dead copper, pour order 1): 59.309,80.264 59.309,30.607 137.033,30.607 137.033,79.756
Ground on Top Layer "NONET_L-01_P-001" (solid, remove dead copper, pour order 2): 59.944,99.187 59.944,31.369 136.398,31.369 136.398,99.187

## Other copper
Bottom Layer:
  region net NetC13_2: 85.344,69.596 84.963,69.215 84.963,66.167 85.725,65.405 86.106,65.786 87.122,65.786 89.027,67.691 87.249,69.469 86.741,69.469 85.598,70.612

## Silkscreen, mask and mechanical layers (free items; w line width, h text height)
Top Overlay:
  text "j2" at 75.057,83.27 h1.4
  text "j1" at 68.58,83.016 h1.4
  text "j3" at 120.777,79.079 h1.4
  text "j9" at 93.599,78.317 h1.4
  text "j4" at 81.407,62.315 h1.4
  text "j8" at 107.442,57.87 h1.4
  text "j5" at 84.836,57.616 h1.4
  text "j6" at 88.773,57.616 h1.4
  text "j7" at 97.917,55.965 h1.4

## Text inside footprints (layer, text, board x,y; h text height)
C1: Top Overlay "+" at 63.652,75.199 h1.5 r270
C2: Top Overlay "+" at 68.986,75.199 h1.5 r270
C3: Top Overlay "+" at 91.973,99.543 h1.5 r270
C4: Top Overlay "+" at 128.422,99.503 h1.5 r270
C6: Top Overlay "+" at 71.78,97.654 h1.5 r270
C7: Top Overlay "+" at 108.102,97.654 h1.5 r270
C8: Top Overlay "+" at 79.009,72.111 h1.5 r180
C9: Top Overlay "+" at 71.713,64.878 h1.5 r180
C11: Top Overlay "+" at 96.985,75.082 h1.5 r40
C12: Top Overlay "+" at 120.244,66.914 h1.5 r90
C14: Top Overlay "+" at 99.797,66.013 h1.5 r90
C15: Top Overlay "+" at 94.336,66.013 h1.5 r90
C16: Top Overlay "+" at 108.024,75.126 h1.5 r40